# EAGLE board 00A-052 (EAGLE 9.6.2)
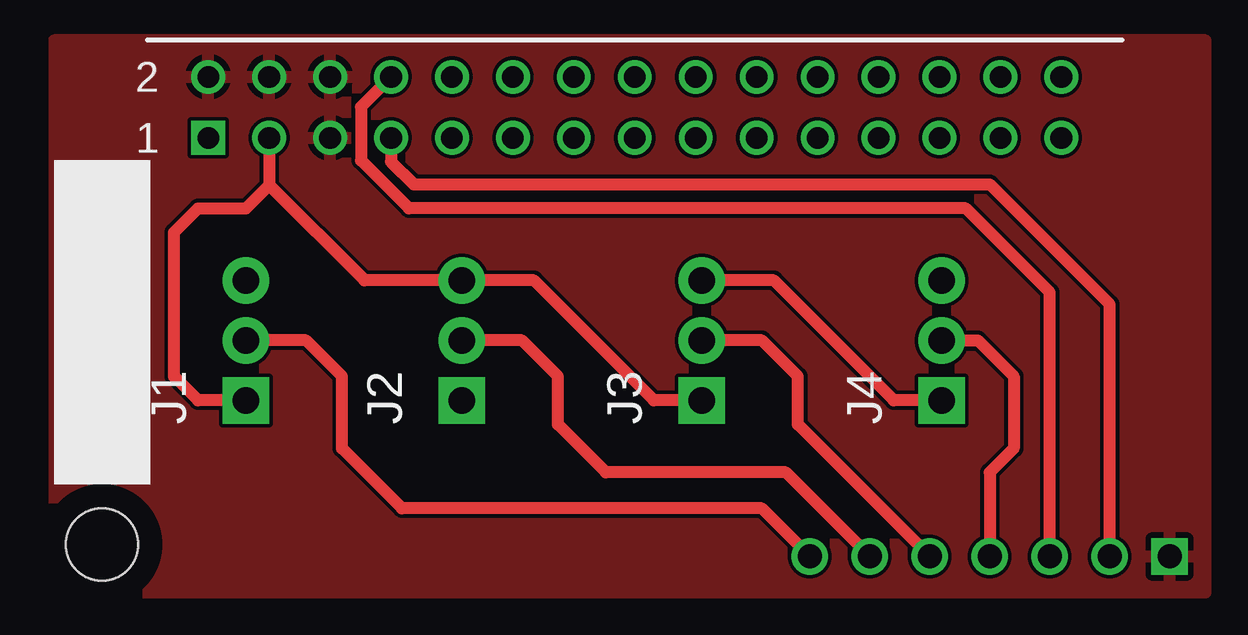
[diagram p0: board, top side]
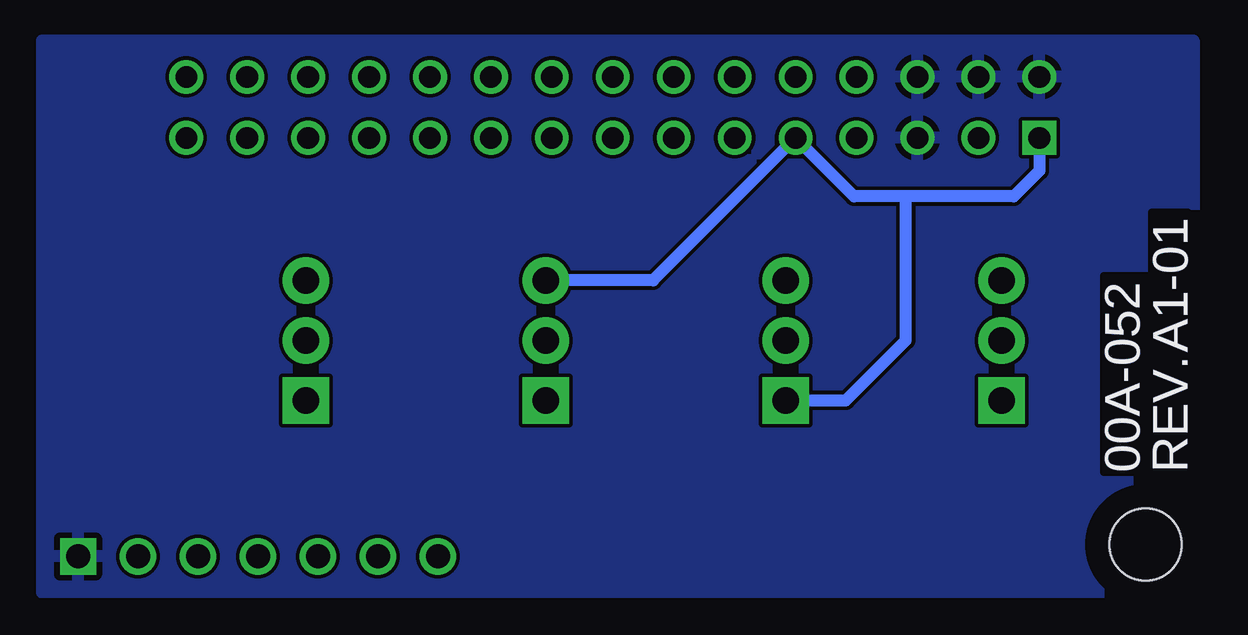
[diagram p1: board, bottom side, seen from below]

No outline drawn. Coordinates in mm, seen from the top.
Copper layers (1*16): Top 0.035mm / dielectric 1.5mm / Bottom 0.035mm
Design rules "default": minimum track width 6mil, minimum drill 0.35mm, track to track 6mil, track to pad 6mil, pad to pad 6mil, via to via 6mil, smd to smd 6mil, copper to edge 40mil, drill to drill 6mil, minimum pad ring 10mil, minimum via ring 8mil, stop-mask expansion 4mil, vias tented up to drill 0mil, thermal gap 10mil

## Footprints (pad centres in the part's own frame; a part is rotated, then mirrored left to right if it is on the bottom)
PINS_3 = drill 1.1 pad 1.93 square: 1 0,0 | drill 1.1 pad 1.93: 2 2.5,0; 3 5,0
PINS_1X7 = drill 1 square: 1 0,0 | drill 1: 2 2.5,0; 3 5,0; 4 7.5,0; 5 10,0; 6 12.5,0; 7 15,0
MINIPCB_0P_25X50 = hole 3: 3,3
PINS30-2X15 = drill 0.9 square: 1 0,0 | drill 0.9: 2 0,2.54; 3 2.54,0; 4 2.54,2.54; 5 5.08,0; 6 5.08,2.54; 7 7.62,0; 8 7.62,2.54; 9 10.16,0; 10 10.16,2.54; 11 12.7,0; 12 12.7,2.54; 13 15.24,0; 14 15.24,2.54; 15 17.78,0; 16 17.78,2.54; 17 20.32,0; 18 20.32,2.54; 19 22.86,0; 20 22.86,2.54; 21 25.4,0; 22 25.4,2.54; 23 27.94,0; 24 27.94,2.54; 25 30.48,0; 26 30.48,2.54; 27 33.02,0; 28 33.02,2.54; 29 35.56,0; 30 35.56,2.54

## Placement (x,y rotation side)
J1  [PINS_3]  9,9 90 top
J2  [PINS_3]  18,9 90 top
J3  [PINS_3]  28,9 90 top
J4  [PINS_3]  38,9 90 top
P1  [PINS_1X7]  47.5,2.5 180 top
PCB1  TO UUT  [MINIPCB_0P_25X50]  0,0 0 top
U$1  ANALOGDISCOVERY  [PINS30-2X15]  7.43,19.94 0 top

## Library data of the parts
J1-J4 P1 U$1 = minipcb
PCB1 = minipcb; NAME1: TO UUT; PART_NUMBER: 00A-052; REVISION: A1-01

## Nets
GND: P1.1 U$1.2 U$1.4 U$1.5 U$1.6
N$1: P1.2 U$1.7
N$2: P1.3 U$1.8
N$3: J1.2 P1.7
N$4: J2.2 P1.6
N$7: J3.2 P1.5
N$8: J4.2 P1.4
N$10: J1.1 J2.3 J3.1 U$1.3
N$11: J2.1 J3.3 J4.1 U$1.1 U$1.9

## Tracks (layer width: path | path; a pad name or v marks a point on that pad's centre or on a via)
GND
  pour Top: 1,1 49,1 49,24 1,24
  pour Bottom: 1,1 49,1 49,24 1,24
N$1
  Top 0.5: P1.2 45,13 40,18 16,18 15.05,18.95 U$1.7
N$2
  Top 0.5: P1.3 42.5,13.5 39,17 15.8,17 13.8,19 13.8,21.23 U$1.8
N$3
  Top 0.5: P1.7 30.5,4.5 15.5,4.5 13,7 13,10 11.5,11.5 J1.2
N$4
  Top 0.5: P1.6 31.5,6 24,6 22,8 22,10 20.5,11.5 J2.2
N$7
  Top 0.5: P1.5 32,8 32,10 30.5,11.5 J3.2
N$8
  Top 0.5: J4.2 39.5,11.5 41,10 41,7 40,6 P1.4
N$10
  Top 0.5: J1.1 7,9 6,10 6,16 7,17 9,17 9.97,17.97 | U$1.3 9.97,17.97 | 9.97,17.97 13.94,14 J2.3 21,14 26,9 J3.1
N$11
  Top 0.5: J4.1 36,9 31,14 J3.3
  Bottom 0.5: U$1.1 7.43,18.57 8.5,17.5 13,17.5 | 13,17.5 15.15,17.5 U$1.9 23.53,14 J3.3 | J2.1 15.5,9 13,11.5 13,17.5